# Altium PCB SensWear-V1R1-Haptic.PcbDoc
Units mm, origin at the board's own origin, x right, y up, seen from the top; angles counter-clockwise.
Board outline 16.6 x 8.5 mm, 4 copper layers (Top Layer, Layer 1, Layer 2, Bottom Layer), stack 0.148 mm thick; 9 components, 13 nets, 44 pads, 24 vias.
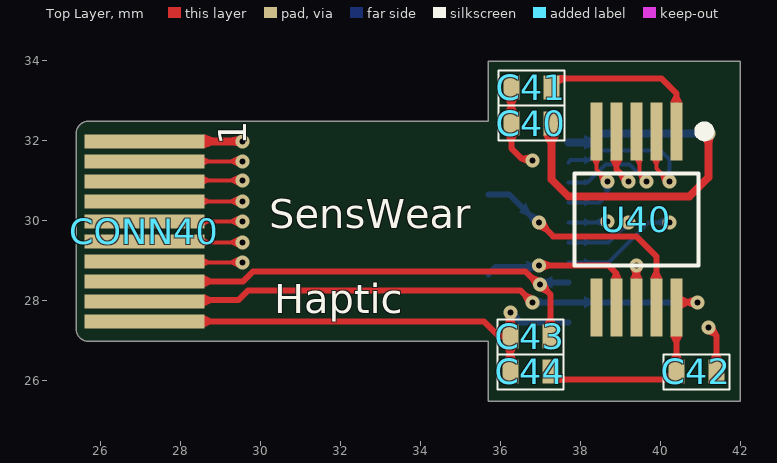
[diagram p0: Top Layer view]
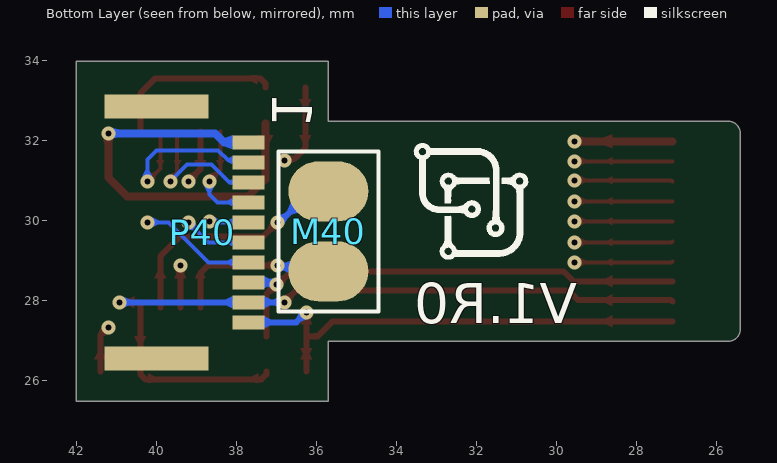
[diagram p1: Bottom Layer view, seen from below]
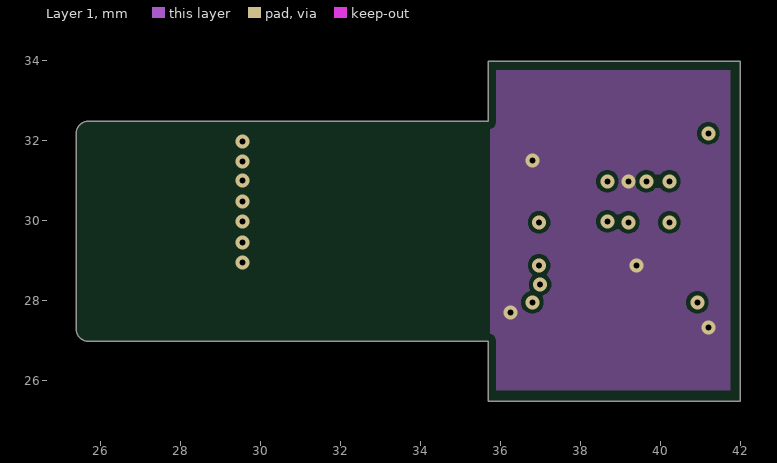
[diagram p2: Layer 1]
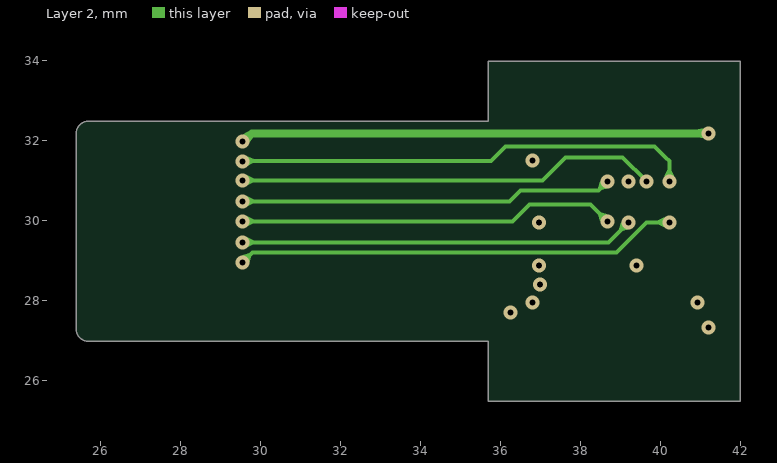
[diagram p3: Layer 2]
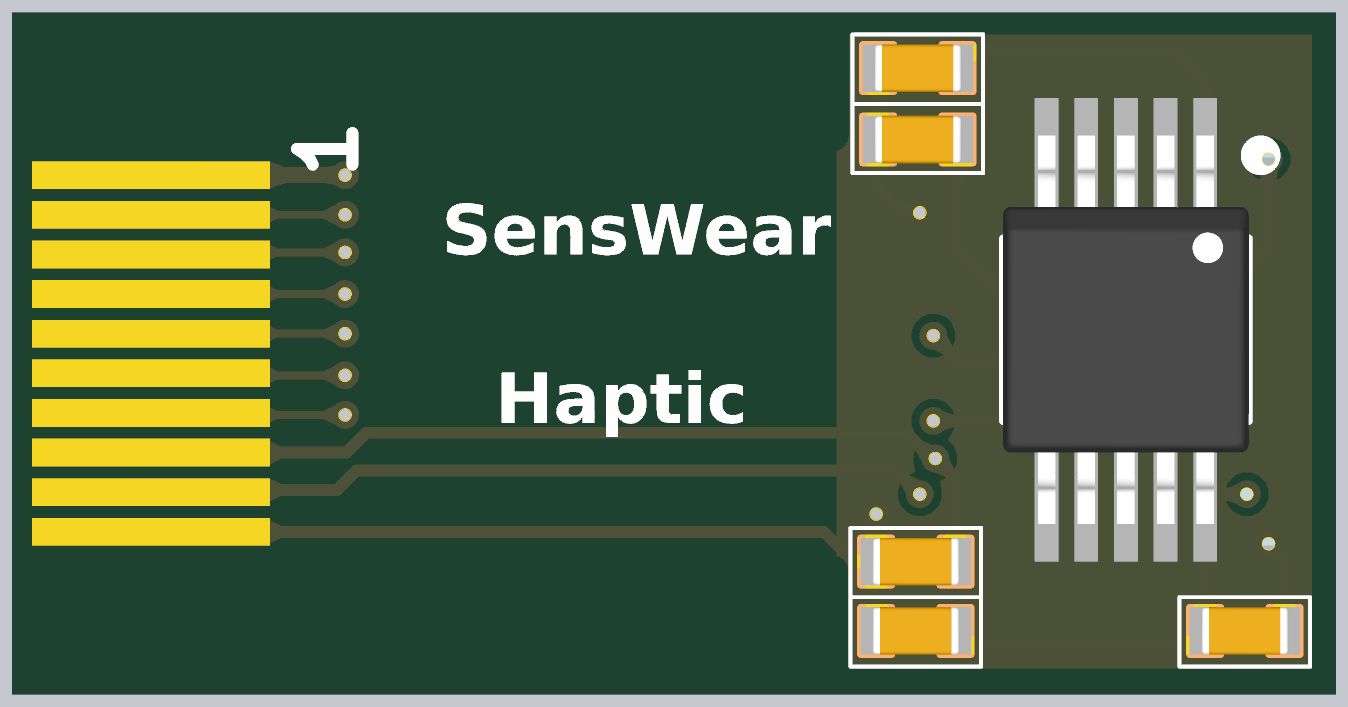
[diagram p4: 3D render of the assembled board from above, using the file's embedded part models]

## Layer stack, top to bottom
Top Solder: solder mask 0.0275, Solder Resist, Dk 2.9
Top Layer: signal copper 0.012
Dielectric 2: prepreg 0.0375, PP-006, Dk 3.3
Layer 1: signal copper 0.012
Dielectric 1: prepreg 0.025, FR-4, Dk 3.3
Layer 2: signal copper 0.012
Dielectric 3: prepreg 0.0375, PP-006, Dk 3.3
Bottom Layer: signal copper 0.012
Bottom Solder: solder mask 0.0275, Solder Resist, Dk 2.9

## Board outline
25.7,26.975 cw(c25.7,27.275) 25.4,27.275 25.4,32.175 cw(c25.7,32.175) 25.7,32.475 35.7,32.475 35.7,33.975 42,33.975 42,25.475 35.7,25.475 35.7,26.975

## Design rules (kind name [scope] priority, off if disabled: settings)
AcuteAngle [All] p1: minimum=7.50000000000000E+0001 checktracksonly=FALSE
BoardOutlineClearance [All] p1: gap=0.2 ignorepadtopadclearanceinfootprint=FALSE
Clearance Clearance_SolderMaskTrack [IsTrack or IsPad] p1 off: gap=0.1 ignorepadtopadclearanceinfootprint=FALSE
Clearance Clearance_PadTrack [IsTrack vs IsPad] p2: gap=0.22 ignorepadtopadclearanceinfootprint=FALSE
Clearance Clearance_BGA [IsTrack vs IsBGA] p3: gap=0.2 ignorepadtopadclearanceinfootprint=FALSE
Clearance [All] p4: gap=0.1 ignorepadtopadclearanceinfootprint=FALSE
ComponentClearance [All] p1: gap=0.1 collisioncheckmode=3 verticalgap=0.1 showdistances=FALSE
MinimumSolderMaskSliver [All] p1: minsoldermaskwidth=0.12
PolygonConnect [All] p1: thpad.connectstyle=Relief thpad.reliefconductorwidth=0.254 thpad.reliefentries=4 thpad.polygonreliefangle="90 Angle" thpad.airgapwidth=0.254 smdpad.connectstyle=Relief smdpad.reliefconductorwidth=0.254 smdpad.reliefentries=4 smdpad.polygonreliefangle="90 Angle" smdpad.airgapwidth=0.254 via.connectstyle=Direct via.reliefconductorwidth=0.254 via.reliefentries=4 via.polygonreliefangle="90 Angle" via.airgapwidth=0.254
RoutingVias [All] p1: holewidth=0.15 width=0.35 viastyle="Through Hole" minholewidth=0.15 minwidth=0.35 maxholewidth=0.711 maxwidth=1.27
SilkToSilkClearance [All] p1: silktosilkclearance=0.1
SilkToSolderMaskClearance [IsPad] p1: minsilkscreentomaskgap=0.1 clearancetoexposedcopper=TRUE
SolderMaskExpansion [All] p1: expansion=0 istentingtop=FALSE
SupplyNets "Schematic Supply Nets_3" [InNet('V_REG_IO')] p1: voltage=0.000
SupplyNets "Schematic Supply Nets_2" [InNet('V_SYS')] p2: voltage=0.000
SupplyNets "Schematic Supply Nets_1" [InNet('1V8')] p3: voltage=0.000
SupplyNets "Schematic Supply Nets" [InNet('GND')] p4: voltage=0.000
Width Width_50Ohm [IsTrack and HasParameter('Impedance') and HasParameterValue('Impedance', '50')] p1: maxlimit=0.254 minlimit=0.076 preferedwidth=0.254 toplayer_minwidth=0.254 midlayer1_maxwidth=0.076 midlayer1_prefwidth=0.076 midlayer2_maxwidth=0.076 midlayer2_prefwidth=0.076 bottomlayer_minwidth=0.254 minimp=50.000000 maximp=50.000000 favimp=50.000000 checkconnectedcopper=TRUE
Width [All] p2: maxlimit=1 minlimit=0.076 preferedwidth=0.1
26 further rules are at their usual default settings.

## Components (designator, comment, footprint, x,y, rotation, side; value= is the part's Value field where it differs from the comment)
C40 "4.7uF" CAPC1005X05N 36.775,32.425 r180 top
C41 "1 uF" CAPC1005X05N 36.775,33.325 r0 top
C42 "0.47 uF" CAPC1005X05N 40.9,26.225 r0 top
C43 "4.7uF" CAPC1005X05N 36.75,27.1 r0 top
C44 "4.7uF" CAPC1005X05N 36.75,26.225 r0 top
CONN40 "NC" 51281-1098-PCB 26.9,27.475 r0 top
M40 "G0832012" G0832012 35.7,29.725 r90 bottom
P40 "51281-1098" 51281-1098__3 40,29.7 r270 bottom
U40 "DRV2605LDGSR" TSSOP50P490X110-10N 39.4,30.025 r270 top

## Footprints (in the part's own frame and the unit in brackets; to place one, negate y for a bottom-side part, rotate by r counter-clockwise, add the part's x,y. Pads: shape width x height; smd on the part's side, far side on the other; paste and mask are expansions set on the pad)
51281-1098-PCB [mm]
  rect 3x0.35 smd paste-400 mask+0: 1(0.2,0) 2(0.2,0.5) 3(0.2,1) 4(0.2,1.5) 5(0.2,2) 6(0.2,2.5) 7(0.2,3) 8(0.2,3.5) 9(0.2,4) 10(0.2,4.5)
51281-1098__3 [mm]
  rect 0.6x2.6 smd: 0(-3.15,0) 0(3.15,0)
  rect 0.35x0.8 smd: 1(-2.25,2.3) 2(-1.75,2.3) 3(-1.25,2.3) 4(-0.75,2.3) 5(-0.25,2.3) 6(0.25,2.3) 7(0.75,2.3) 8(1.25,2.3) 9(1.75,2.3) 10(2.25,2.3)
  body extent -3.55,-1.48 3.55,2.57, height 1.17
CAPC1005X05N [mm] "Chip Capacitor, 2-Leads, Body 1.00x0.50mm, IPC Medium Density"
  rect 0.4x0.6 smd mask+0.04: 1(-0.5,0) 2(0.5,0)
  silkscreen extent -0.82,-0.45 0.82,0.43, body extent -0.55,-0.3 0.55,0.3, height 0.6
G0832012 [mm]
  oval 1.5x2 smd mask+0.05: 1(-1,0) 2(1,0)
  silkscreen extent -2,-1.25 2,1.25, body extent -1.75,-1 1.75,1, height 1
TSSOP50P490X110-10N [mm] "TSSOP, 10-Leads, Body 3.00x3.00mm, Pitch 0.50mm, IPC Medium Density"
  rect 1.45x0.3 smd paste+0 mask+0: 1(-2.2,1) 2(-2.2,0.5) 3(-2.2,0) 4(-2.2,-0.5) 5(-2.2,-1) 6(2.2,-1) 7(2.2,-0.5) 8(2.2,0) 9(2.2,0.5) 10(2.2,1)
  silkscreen extent -2.32,-1.55 1.15,1.83, body extent -2.45,-1.55 2.45,1.55, height 1.1

## Part data
C40 C43 C44: library part GRM155R61A475MEAAD, "Multilayer Ceramic Capacitor, 4.7 uF, 10 V, ± 20%, X5R, 0402 [1005 Metric]", Case Code (Imperial)=0402, Case Code (Metric)=1005, Dielectric=1537DielectricType, Manufacturer=Murata, Max Operating Temperature=85°C, Min Operating Temperature=-55°C, Supplier Part Number 1=81-GRM155R61A475MEAD, Tolerance=20%, Voltage Rating=10V, Case/Package=0402, Category="Ceramic Capacitors", ComponentLink1Description=http://www.farnell.com/datasheets/2189109.pdf?src-supplier=Farnell, ComponentLink1URL=http://www.farnell.com/datasheets/2189109.pdf?src-supplier=Farnell, ComponentLink2Description=http://www.farnell.com/datasheets/2189109.pdf?src-supplier=Newark, ComponentLink2URL=http://www.farnell.com/datasheets/2189109.pdf?src-supplier=Newark, ComponentLink3Description=http://www.farnell.com/datasheets/2189109.pdf?src-supplier=Element14, ComponentLink3URL=http://www.farnell.com/datasheets/2189109.pdf?src-supplier=Element14, ComponentLink4Description=http://datasheet.octopart.com/GRM155R61A475MEAAD-Murata-datasheet-68589269.pdf?src-supplier=Distrelec, ComponentLink4URL=http://datasheet.octopart.com/GRM155R61A475MEAAD-Murata-datasheet-68589269.pdf?src-supplier=Distrelec, ComponentLink5Description=http://datasheet.octopart.com/GRM155R61A475MEAAD-Murata-datasheet-68589269.pdf?src-supplier=Farnell, ComponentLink5URL=http://datasheet.octopart.com/GRM155R61A475MEAAD-Murata-datasheet-68589269.pdf?src-supplier=Farnell, ComponentLink6Description=https://search.murata.co.jp/Ceramy/image/img/A01X/G101/ENG/GRM155R61A475MEAA-01.pdf?src-supplier=Digi-Key, ComponentLink6URL=https://search.murata.co.jp/Ceramy/image/img/A01X/G101/ENG/GRM155R61A475MEAA-01.pdf?src-supplier=Digi-Key, ComponentLink7Description=http://datasheet.octopart.com/GRM155R61A475MEAAD-Murata-datasheet-68589269.pdf?src-supplier=Future+Electronics, ComponentLink7URL=http://datasheet.octopart.com/GRM155R61A475MEAAD-Murata-datasheet-68589269.pdf?src-supplier=Future+Electronics, ComponentLink8Description=https://datasheet.octopart.com/GRM155R61A475MEAAD-Murata-datasheet-68589269.pdf?src-supplier=Newark, ComponentLink8URL=https://datasheet.octopart.com/GRM155R61A475MEAAD-Murata-datasheet-68589269.pdf?src-supplier=Newark, ComponentLink9Description=http://datasheet.octopart.com/GRM155R61A475MEAAD-Murata-datasheet-68589269.pdf?src-supplier=Verical, ComponentLink9URL=http://datasheet.octopart.com/GRM155R61A475MEAAD-Murata-datasheet-68589269.pdf?src-supplier=Verical, ComponentLink10Description=https://datasheet.octopart.com/GRM155R61A475MEAAD-Murata-datasheet-165579666.pdf?src-supplier=TME, ComponentLink10URL=https://datasheet.octopart.com/GRM155R61A475MEAAD-Murata-datasheet-165579666.pdf?src-supplier=TME, ComponentLink11Description=http://datasheet.octopart.com/GRM155R61A475MEAAD-Murata-datasheet-68589269.pdf?src-supplier=Quest, ComponentLink11URL=http://datasheet.octopart.com/GRM155R61A475MEAAD-Murata-datasheet-68589269.pdf?src-supplier=Quest, ComponentLink12Description=http://datasheet.octopart.com/GRM155R61A475MEAAD-Murata-datasheet-68589269.pdf?src-supplier=TTI, ComponentLink12URL=http://datasheet.octopart.com/GRM155R61A475MEAAD-Murata-datasheet-68589269.pdf?src-supplier=TTI, ComponentLink13Description=http://datasheet.octopart.com/GRM155R61A475MEAAD-Murata-datasheet-68589269.pdf?src-supplier=NAC+Semi, ComponentLink13URL=http://datasheet.octopart.com/GRM155R61A475MEAAD-Murata-datasheet-68589269.pdf?src-supplier=NAC+Semi, Height=650um, Length=1mm, Manufacturer Part Number=GRM155R61A475MEAAD, Material=4241ConductorMaterial, Mounting Technology="Surface Mount", Packaging="Tape and Reel", Pricing="10000=0,0187, 50000=0,0159, 100000=0,0132 (USD)", RoHS=Yes, RoHS Compliant=Yes, Series=GRM, Stock=930000, Supplier 1=Mouser, Supplier 2=Farnell, Supplier Part Number 2=3581674, Thickness=500um, Voltage Rating (DC)=10V, Width=500um
C41: library part GRM155R61A105KE15D, "CAP CER 1UF 10V X5R 0402", Capacitance=1µF, Manufacturer="Murata Electronics North America", Operating Temperature="-55°C ~ 85°C", Package / Case="0402 (1005 Metric)", Ratings=-, Supplier Part Number 1=490-3890-6-ND, Temperature Coefficient=X5R, Tolerance=±10%, Voltage - Rated=10V, Applications="General Purpose", Category=Capacitors, ComponentLink1Description=http://www.murata.com/~/media/webrenewal/support/library/catalog/products/capacitor/mlcc/c02e.ashx, ComponentLink1URL=http://www.murata.com/~/media/webrenewal/support/library/catalog/products/capacitor/mlcc/c02e.ashx, Features=-, Height - Seated (Max)=-, Lead Spacing=-, Lead Style=-, Manufacturer Part Number=GRM155R61A105KE15D, Mounting Type="Surface Mount, MLCC", Packaging=Digi-Reel®, Part Status=Active, Pricing 1="1=0.1, 10=0.024, 50=0.013, 100=0.011, 250=0.009, 500=0.0077, 1000=0.006, 5000=0.005 (USD)", RoHS="RoHS Compliant", Size / Dimension="0.039\" L x 0.020\" W (1.00mm x 0.50mm)", Stock 1=5520111, Supplier 1=Digi-Key, Thickness (Max)="0.022\" (0.55mm)"
C42: library part GRM155R61A474KE15D, "CAP CER 0.47UF 10V X5R 0402", Capacitance=0.47µF, Manufacturer="Murata Electronics North America", Operating Temperature="-55°C ~ 85°C", Package / Case="0402 (1005 Metric)", Ratings=-, Supplier Part Number 1=490-3264-6-ND, Temperature Coefficient=X5R, Tolerance=±10%, Voltage - Rated=10V, Applications="General Purpose", Category=Capacitors, ComponentLink1Description=http://www.murata.com/~/media/webrenewal/support/library/catalog/products/capacitor/mlcc/c02e.pdf, ComponentLink1URL=http://www.murata.com/~/media/webrenewal/support/library/catalog/products/capacitor/mlcc/c02e.pdf, Features=-, Height - Seated (Max)=-, Lead Spacing=-, Lead Style=-, Manufacturer Part Number=GRM155R61A474KE15D, Mounting Type="Surface Mount, MLCC", Packaging=Digi-Reel®, Part Status=Active, Pricing 1="1=0.08, 10=0.054, 50=0.029, 100=0.0246, 250=0.02008, 500=0.01718, 1000=0.01339, 5000=0.01116 (GBP)", RoHS="RoHS Compliant", Size / Dimension="0.039\" L x 0.020\" W (1.00mm x 0.50mm)", Stock 1=715573, Supplier 1=Digi-Key, Thickness (Max)="0.022\" (0.55mm)"
CONN40: library part 51281-1098-PCB, System=Connector
M40: "VIBRATION MOTOR 1.8V", Manufacturer="Jinlong Machinery & Electronics, Inc.", Operating Temperature="-20°C ~ 60°C", Power - Rated=-, Supplier Part Number 1=1670-1034-ND, Voltage - Rated=1.8VAC, Approvals=-, Category="Motors, Solenoids, Driver Boards/Modules", ComponentLink1Description=http://www.vibration-motor.com/products/download/G0832012.pdf, ComponentLink1URL=http://www.vibration-motor.com/products/download/G0832012.pdf, Diameter - Shaft=-, Encoder Type=-, Features=-, Function="Vibration, LRA", Gear Reduction Ratio=-, Length - Shaft and Bearing=-, Manufacturer Part Number=G0832012, Motor Type=-, Mounting Hole Spacing=-, Part Status=Active, Pricing="1=3.17, 5=3.002, 10=2.918, 25=2.8348, 50=2.5846, 100=2.3345, 250=2.25112, 500=2.21778, 1000=2.08438 (USD)", RoHS="RoHS Compliant", RPM=-, Size / Dimension="Round - 0.315\" Dia (8.00mm)", Stock=810, Supplier 1=Digi-Key, Termination Style="Wire Leads", Torque - Max Momentary (oz-in / mNm)=-, Torque - Rated (oz-in / mNm)=-, Type="AC Motor", Weight=-
P40: "FFC/FPC Connector, Surface Mount, Right-Angle, Non-ZIF, Dual Contact Style", Manufacturer=Molex, Supplier Part Number=900-0512811098CT-ND, Supplier Part Number 1=538-51281-1098, ComponentLink1Description=https://datasheet.octopart.com/51281-1098-Molex-datasheet-165827616.pdf?src-supplier=Farnell, ComponentLink1URL=https://datasheet.octopart.com/51281-1098-Molex-datasheet-165827616.pdf?src-supplier=Farnell, Manufacturer Part Number=51281-1098, Pricing="1=0.7, 10=0.594, 25=0.5568, 50=0.53, 100=0.5047, 250=0.47304, 500=0.45042, 1000=0.42891 (USD)", RoHS=No, Stock=2876, Supplier=Digikey, Supplier 1=Mouser, Supplier 2=Digikey, Supplier 3=Digikey, Supplier Part Number 2=900-0512811098CT-ND, Supplier Part Number 3=900-0512811098DKR-ND, System=Connector
U40: "NEXT GEN DRV260X LRA/ERM DRIVER", Current - Output=-, Manufacturer="Texas Instruments", Operating Temperature="-40°C ~ 150°C (TJ)", Package / Case="10-TFSOP, 10-MSOP (0.118\", 3.00mm Width)", Supplier Device Package=10-VSSOP, Supplier Part Number 1=296-40032-6-ND, Voltage - Load="2 V ~ 5.5 V", Applications="Haptic Feedback", Category="Integrated Circuits (ICs)", ComponentLink1Description=http://www.ti.com/lit/ds/symlink/drv2605l.pdf, ComponentLink1URL=http://www.ti.com/lit/ds/symlink/drv2605l.pdf, Function="Driver - Fully Integrated, Control and Power Stage", Interface=I²C, Manufacturer Part Number=DRV2605LDGSR, Motor Type - AC, DC="ERM, LRA", Motor Type - Stepper=-, Mounting Type="Surface Mount", Output Configuration="Half Bridge (2)", Packaging=Digi-Reel®, Part Status=Active, Pricing 1="1=4.18, 10=3.751, 100=3.073, 500=2.616, 1000=2.20626 (USD)", RoHS="RoHS Compliant", Step Resolution=-, Stock 1=2856, Supplier 1=Digi-Key, Technology="Power MOSFET", Voltage - Supply="2 V ~ 5.5 V"

## Via types
v1: diameter 0.35, hole 0.15, Top Layer to Bottom Layer, tented both sides, 24 vias

## Nets (pads, with @x,y where several pads share a name; then routed paths per layer and width w, separated by ;. In a path a pad name is that pad's centre, name@x,y a point inside that pad or via, vN(x,y) a via of type N, cw(c..) or ccw(c..) an arc to the next point about the centre after c; other vN are vias at no path point)
1V8: C43.2 CONN40.3 P40.8 | length 12.3
  Top Layer w0.15: CONN40.3 29.57,28.475 29.82,28.725 36.626,28.725 36.951,28.4 v1(36.996,28.4) 37.25,28.146 C43.2
  Bottom Layer w0.15: v1(36.996,28.4) 37.05,28.4 37.1,28.45 P40.8
GND: C40.2 C41.1 C42.2 C43.1 C44.1 CONN40.1 P40.10 U40.4 U40.8 | length 18.1
  Top Layer w0.15: CONN40.1 35.589,27.475 35.964,27.1 C43.1 ; C44.1 C43.1 ; v1@36.25,27.6 C43.1 ; C41.1 C40.2 36.275,31.8 36.537,31.538 36.762,31.538 v1(36.8,31.5) ; U40.4 38.955,32.17 38.9,32.115 38.9,31.275 v1(39.2,30.975) ; U40.8 v1(39.4,28.875) ; v1@41.15,27.375 41.4,27.125 C42.2
  Bottom Layer w0.15: v1(36.25,27.7) 36.5,27.45 P40.10
  other v1: 41.2,27.325
GPIO_0: CONN40.7 P40.4 U40.5 | length 14.5
  Top Layer w0.1: CONN40.7 v1(29.55,30.475) ; U40.5 38.4,31.275 38.675,31 v1(38.675,30.975)
  Layer 2 w0.1: v1(29.55,30.475) 36.225,30.475 36.5,30.75 38.45,30.75 v1(38.675,30.975)
  Bottom Layer w0.1: P40.4 38.475,30.45 38.675,30.65 v1(38.675,30.975)
GPIO_1: CONN40.6 P40.5 | length 12.9
  Top Layer w0.1: CONN40.6 v1(29.55,29.975)
  Layer 2 w0.1: v1(29.55,29.975) 36.3,29.975 36.725,30.4 38.25,30.4 v1(38.675,29.975)
  Bottom Layer w0.1: P40.5 38.65,29.95 v1(38.675,29.975)
GPIO_2: CONN40.5 P40.6 | length 14
  Top Layer w0.1: CONN40.5 27.125,29.45 v1(29.55,29.45)
  Layer 2 w0.1: v1(29.55,29.45) 38.7,29.45 v1(39.2,29.95)
  Bottom Layer w0.1: P40.6 38.7,29.45 v1(39.2,29.95)
GPIO_3: CONN40.4 P40.7 | length 16.5
  Top Layer w0.1: CONN40.4 27.125,28.95 v1(29.55,28.95)
  Layer 2 w0.1: v1(29.55,28.95) 29.8,29.2 38.91,29.2 39.66,29.95 v1(40.225,29.95)
  Bottom Layer w0.1: P40.7 38.7,28.95 39.7,29.95 v1(40.225,29.95)
NetC41_2: C41.2 U40.1 | length 4.4
  Top Layer w0.15: C41.2 37.275,33.425 37.4,33.55 40.025,33.55 40.4,33.175 U40.1
NetM40_1: M40.1 U40.7 | length 4.2
  Top Layer w0.15: v1(36.971,28.875) 38.7,28.875 38.9,28.675 U40.7
  Bottom Layer w0.15: M40.1@35.7,28.65 35.887,28.837 36.933,28.837 v1(36.971,28.875)
NetM40_2: M40.2 U40.9 | length 6.1
  Top Layer w0.15: v1(36.971,29.95) 37.321,29.6 39.4,29.6 39.9,29.1 U40.9
  Bottom Layer w0.15: M40.2@35.7,30.65 36.217,30.65 36.917,29.95 v1(36.971,29.95)
SCL: CONN40.9 P40.2 U40.2 | length 18.6
  Top Layer w0.1: CONN40.9 v1(29.55,31.475) ; U40.2 39.9,31.3 v1(40.225,30.975)
  Layer 2 w0.1: v1(29.55,31.475) 29.562,31.487 35.762,31.487 36.125,31.85 39.86,31.85 40.136,31.574 40.225,31.485 v1(40.225,30.975)
  Bottom Layer w0.1: P40.2 37.755,31.505 38.212,31.505 38.457,31.75 40,31.75 40.225,31.525 v1(40.225,30.975)
SDA: CONN40.8 P40.3 U40.3 | length 16.7
  Top Layer w0.1: CONN40.8 27.125,31 v1(29.55,31) ; U40.3 39.48,32.145 39.48,31.18 39.65,31.01 v1(39.65,30.975)
  Layer 2 w0.1: v1(29.55,31) 37.05,31 37.625,31.575 39.06,31.575 39.65,30.985 v1(39.65,30.975)
  Bottom Layer w0.1: P40.3 38.175,30.95 38.625,31.4 39.235,31.4 39.65,30.985 v1(39.65,30.975)
V_REG_IO: C42.1 C44.2 CONN40.2 P40.9 U40.10 | length 19.7
  Top Layer w0.15: CONN40.2 27.13,28.005 29.454,28.005 29.699,28.25 36.5,28.25 v1(36.8,27.95) ; C44.2 37.25,26.15 37.375,26.025 40.275,26.025 40.4,26.15 C42.1 40.4,27.875 40.475,27.95 v1(40.925,27.95)
  Bottom Layer w0.15: v1(36.8,27.95) P40.9 v1(40.925,27.95)
V_SYS: C40.1 CONN40.10 P40.1 | length 24.6
  Top Layer w0.2: CONN40.10 v1(29.55,31.975) ; C40.1 37.275,31.025 37.7,30.6 40.73,30.6 41.2,31.07 v1(41.2,32.175)
  Layer 2 w0.2: v1(29.55,31.975) 29.591,31.975 29.791,32.175 v1(41.2,32.175)
  Bottom Layer w0.2: P40.1 38.303,31.95 38.528,32.175 v1(41.2,32.175)
pads on no net: P40.0 U40.6

## Polygon pours and split planes (outlines as drawn)
GND on Layer 1 "GND_L02_P000" (solid, remove dead copper, pour order 0): 35.75,33.75 41.75,33.75 41.75,25.75 35.75,25.75

## Silkscreen, mask and mechanical layers (free items; w line width, h text height)
Top Overlay:
  text "SensWear" at 30.225,29.55 h1.25
  text "Haptic" at 30.35,27.425 h1.25
Bottom Overlay:
  drawing of 3 lines, arcs and shapes, not listed
  text "1" at 37.1,32.3 h1 r90
  text "V1.R0" at 29.475,27.425 h1
Board:
  the board outline again, w0.1
Fab Notes:
  the board outline again, w0.1
Top Assembly:
  lines w0.1: 25.4,24.3 25.4,34.3 ; 30.2,24.55 30.2,33.875 ; 35.7,24.3 35.7,34.1

## Dimensions
25.4,34.3 to 42,33.975 on Bottom Assembly
25.4,24.3 to 30.2,24.55 on Bottom Assembly
35.7,24.3 to 42,25.475 on Bottom Assembly
30.2,33.875 to 35.7,34.1 on Bottom Assembly
42,25.475 to 42,33.975 on Bottom Assembly

## Text inside footprints (layer, text, board x,y; h text height)
CONN40: Fab Notes "Stiffner" at 25.175,27.275 h0.7 r90; Top Overlay "1" at 29.65,31.875 h0.7 r90